# Altium PCB 刷卡面板.PcbDoc
Units mm, origin at the board's own origin, x right, y up, seen from the top; angles counter-clockwise.
Board outline 52 x 37 mm, 2 copper layers (Top Layer, Bottom Layer); 6 components, 3 nets, 12 pads, 2 vias.
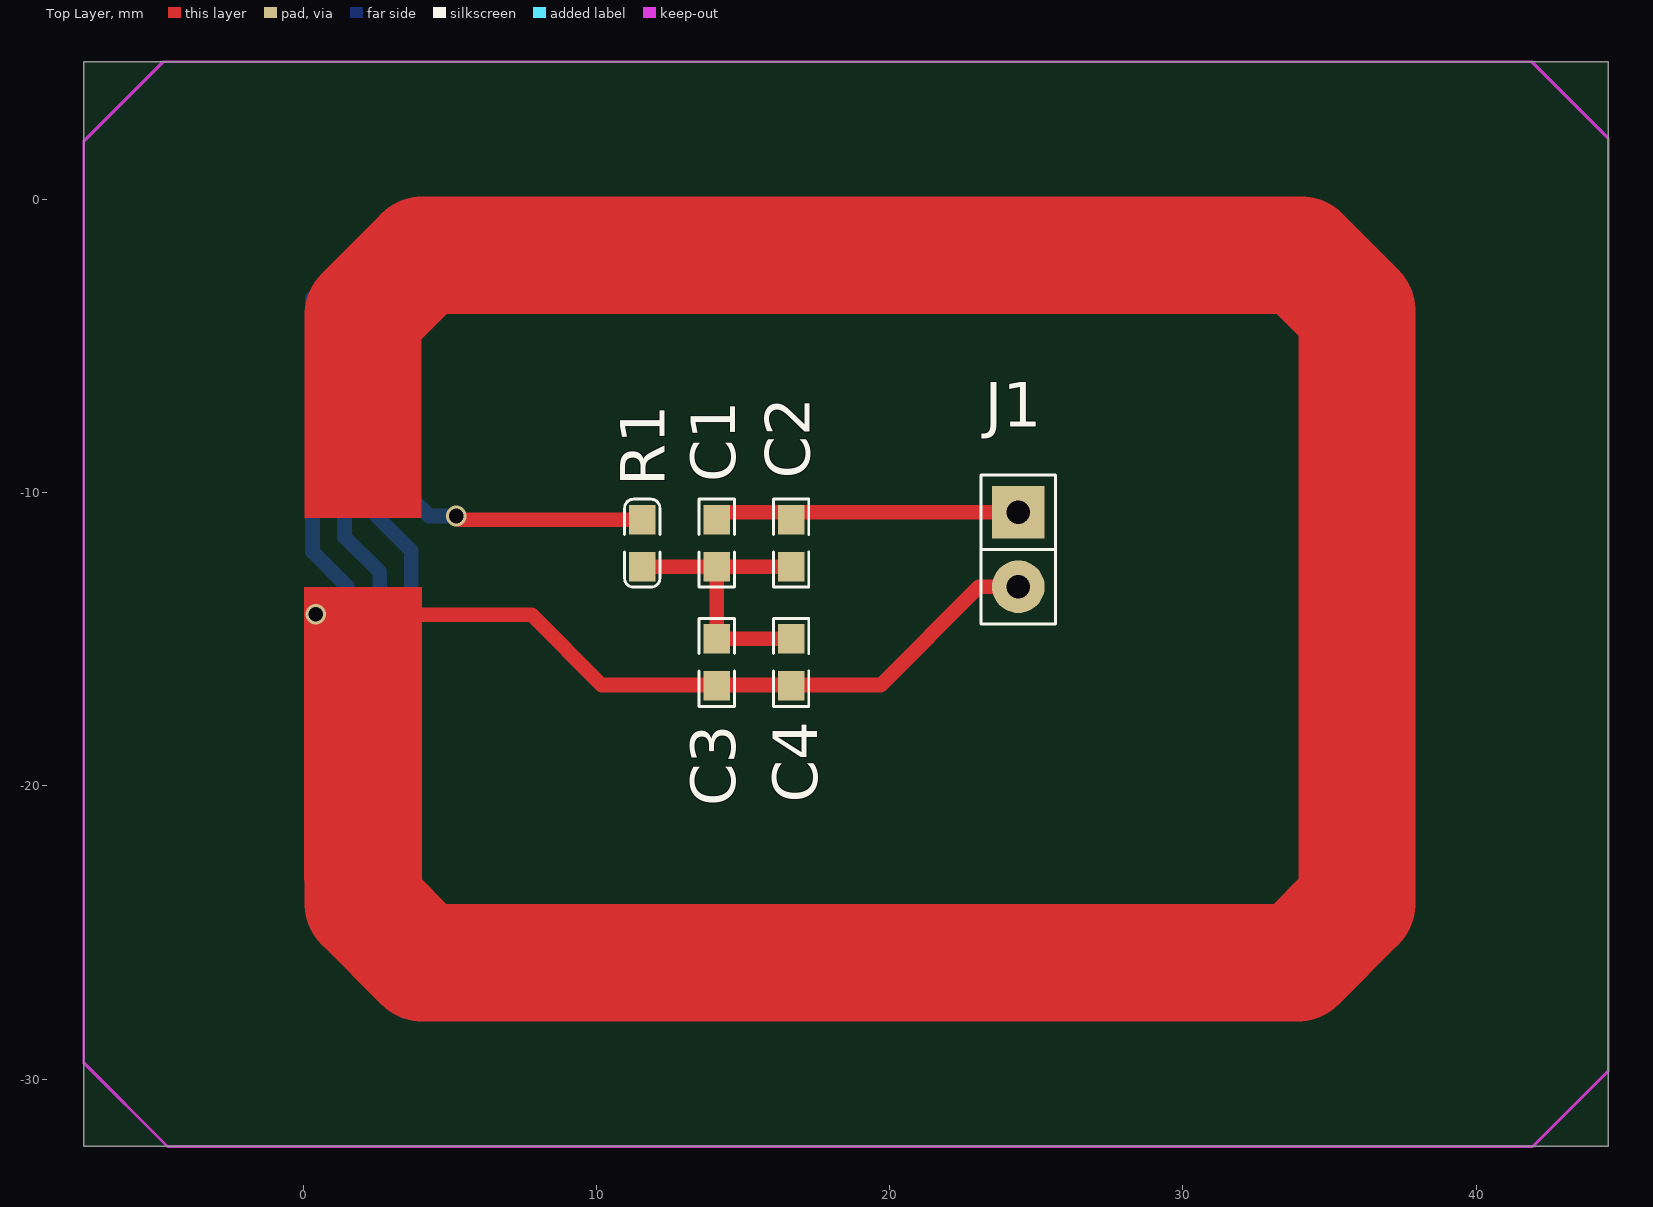
[diagram p0: Top Layer view]
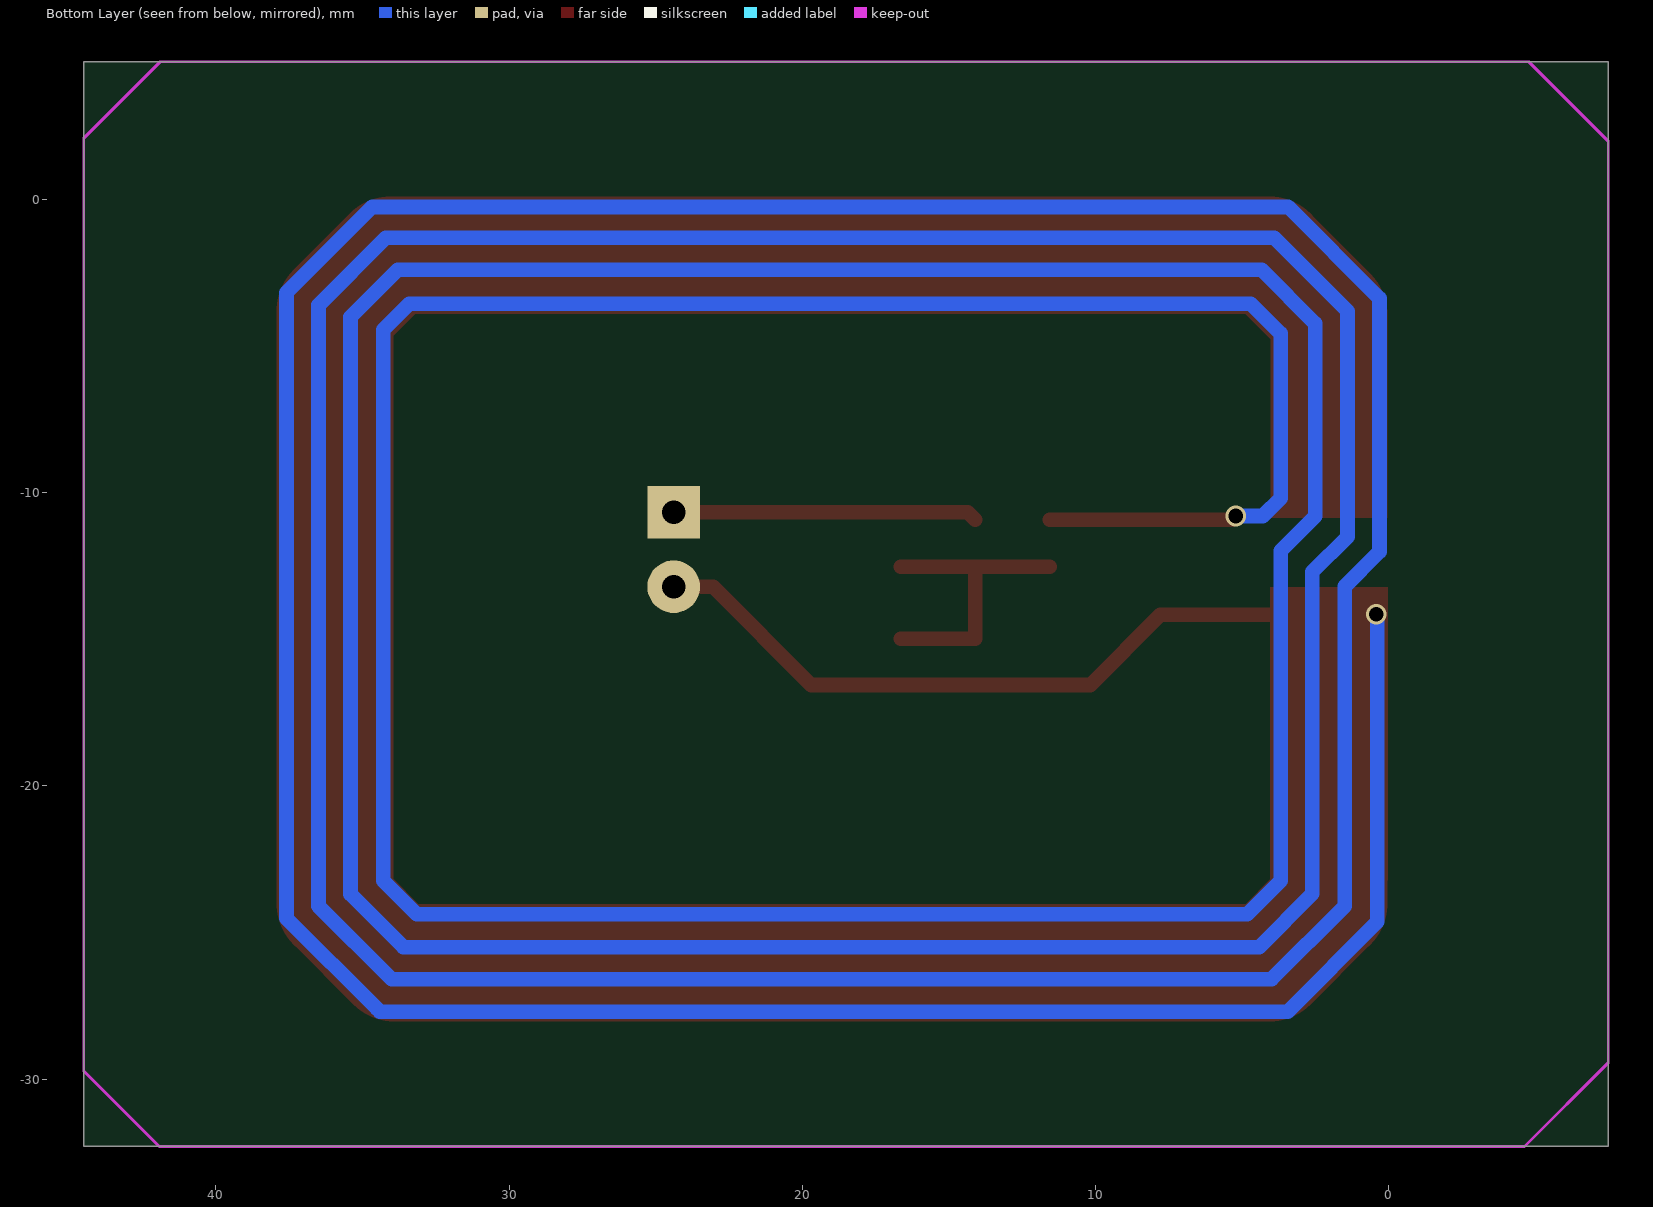
[diagram p1: Bottom Layer view, seen from below]

## Layer stack, top to bottom
Top Layer: signal copper 0.0356
Dielectric: dielectric 0.32, FR-4, Dk 4.8
Bottom Layer: signal copper 0.0356

## Board outline
-7.493,-32.301 -7.493,4.699 44.507,4.699 44.507,-32.301

## Design rules (kind name [scope] priority, off if disabled: settings)
Clearance [All] p1: gap=0.254
PolygonConnect [All] p1: connectstyle=Relief reliefconductorwidth=0.254 reliefentries=4 polygonreliefangle="90 Angle"
RoutingVias [All] p1: holewidth=0.711 width=1.27 viastyle="Through Hole" minholewidth=0.711 minwidth=1.27 maxholewidth=0.711 maxwidth=1.27
SilkscreenOverComponentPads [All] p1: minsilkscreentomaskgap=0.254
SolderMaskExpansion [All] p1: expansion=0.102
Width [All] p1: maxlimit=4 minlimit=0.2 preferedwidth=0.254 minimp=50.000000 maximp=50.000000 favimp=50.000000
27 further rules are at their usual default settings.

## Components (designator, comment, footprint, x,y, rotation, side; value= is the part's Value field where it differs from the comment)
C1 "CAP" 0603_C 14.097,-10.922 r270 top
C2 "CAP" 0603_C 16.637,-10.922 r270 top
C3 "CAP" 0603_C 14.097,-14.986 r270 top
C4 "CAP" 0603_C 16.637,-14.986 r270 top
J1 "CON2" sip2 24.384,-10.668 r270 top
R1 "RES2" 0603 11.557,-10.922 r270 top

## Footprints (in the part's own frame and the unit in brackets; to place one, negate y for a bottom-side part, rotate by r counter-clockwise, add the part's x,y. Pads: shape width x height; smd on the part's side, far side on the other; paste and mask are expansions set on the pad)
0603 [mm]
  rect 1x0.9 smd: 1(0,0) 2(1.6,0)
  silkscreen extent -0.7,-0.6 2.3,0.6
0603_C [mm]
  rect 1x0.9 smd: 1(0,0) 2(1.6,0)
  silkscreen extent -0.7,-0.6 2.3,0.6
sip2 [mm]
  rect 1.8x1.8 hole 0.813: 1(0,0)
  round 1.8 hole 0.813: 2(2.54,0)
  silkscreen extent -1.27,-1.27 3.81,1.27

## Part data
C1 C2 C3 C4: "Capacitor"
J1: "Connector"

## Via types
v1: diameter 0.7, hole 0.5, Top Layer to Bottom Layer, tented both sides, 2 vias

## Nets (pads, with @x,y where several pads share a name; then routed paths per layer and width w, separated by ;. In a path a pad name is that pad's centre, name@x,y a point inside that pad or via, vN(x,y) a via of type N, cw(c..) or ccw(c..) an arc to the next point about the centre after c; other vN are vias at no path point)
GND: C3.2 C4.2 J1.2 R1.1 | length 578
  Top Layer w0.5: 3.2,-14.16 7.78,-14.16 10.18,-16.56 19.69,-16.56 23.042,-13.208 J1.2 ; v1@5.334,-10.922 R1.1
  Top Layer w4: 2.032,-17.145 2.032,-24.003 4.064,-26.035 33.909,-26.035 35.941,-24.003 35.941,-3.81 34.036,-1.905 4.064,-1.905 2.032,-3.937 2.032,-8.33
  Bottom Layer w0.5: v1@0.381,-14.16 0.381,-24.638 3.443,-27.7 34.4,-27.7 35.2,-26.9 ; v1(5.207,-10.795) 4.295,-10.795 3.683,-10.183 3.683,-4.572 4.699,-3.556 33.401,-3.556 34.29,-4.445 34.29,-23.241 33.147,-24.384 4.826,-24.384 3.683,-23.241 3.683,-11.983 2.5,-10.8 2.5,-4.231 4.331,-2.4 33.8,-2.4 35.406,-4.006 35.406,-23.694 33.6,-25.5 4.418,-25.5 2.6,-23.682 2.6,-12.7 1.4,-11.5 1.4,-3.807 3.907,-1.3 34.2,-1.3 36.5,-3.6 36.5,-24.1 34,-26.6 3.994,-26.6 1.5,-24.106 1.5,-13.2 0.31,-12.01 0.31,-3.373 3.429,-0.254 34.671,-0.254 37.592,-3.175 37.592,-24.511 34.503,-27.6
  other v1: 0.42,-14.15
NetC1_1: C1.1 C2.1 J1.1 | length 10.4
  Top Layer w0.5: C1.1 14.351,-10.668 J1.1
NetC1_2: C1.2 C2.2 C3.1 C4.1 R1.2 | length 10.1
  Top Layer w0.5: R1.2 C1.2 ; C4.1 C3.1 C1.2 ; C2.2 C1.2

## Keep-outs
Keep-Out Layer:
  lines w0.1: -7.493,-29.447 -4.639,-32.301 41.929,-32.301 44.507,-29.723 44.507,2.093 41.901,4.699 -4.781,4.699 -7.493,1.987 -7.493,-29.447

## Other copper
Top Layer:
  rectangle net GND: 0.03,-10.86 4.03,-6.05
  rectangle net GND: 0.02,-23.22 4.04,-13.22